# Altium PCB mdap.PcbDoc (part 2 of 2)
Units mil, origin at the board's own origin, x right, y up, seen from the top; angles counter-clockwise.
Board outline 1970 x 1970 mil, 4 copper layers (Top Layer, Internal Plane 1, Signal Layer 1, Bottom Layer), stack 45.004 mil thick; 153 components, 124 nets, 474 pads, 214 vias.
Unrouted connection lines stored in the file: 3.
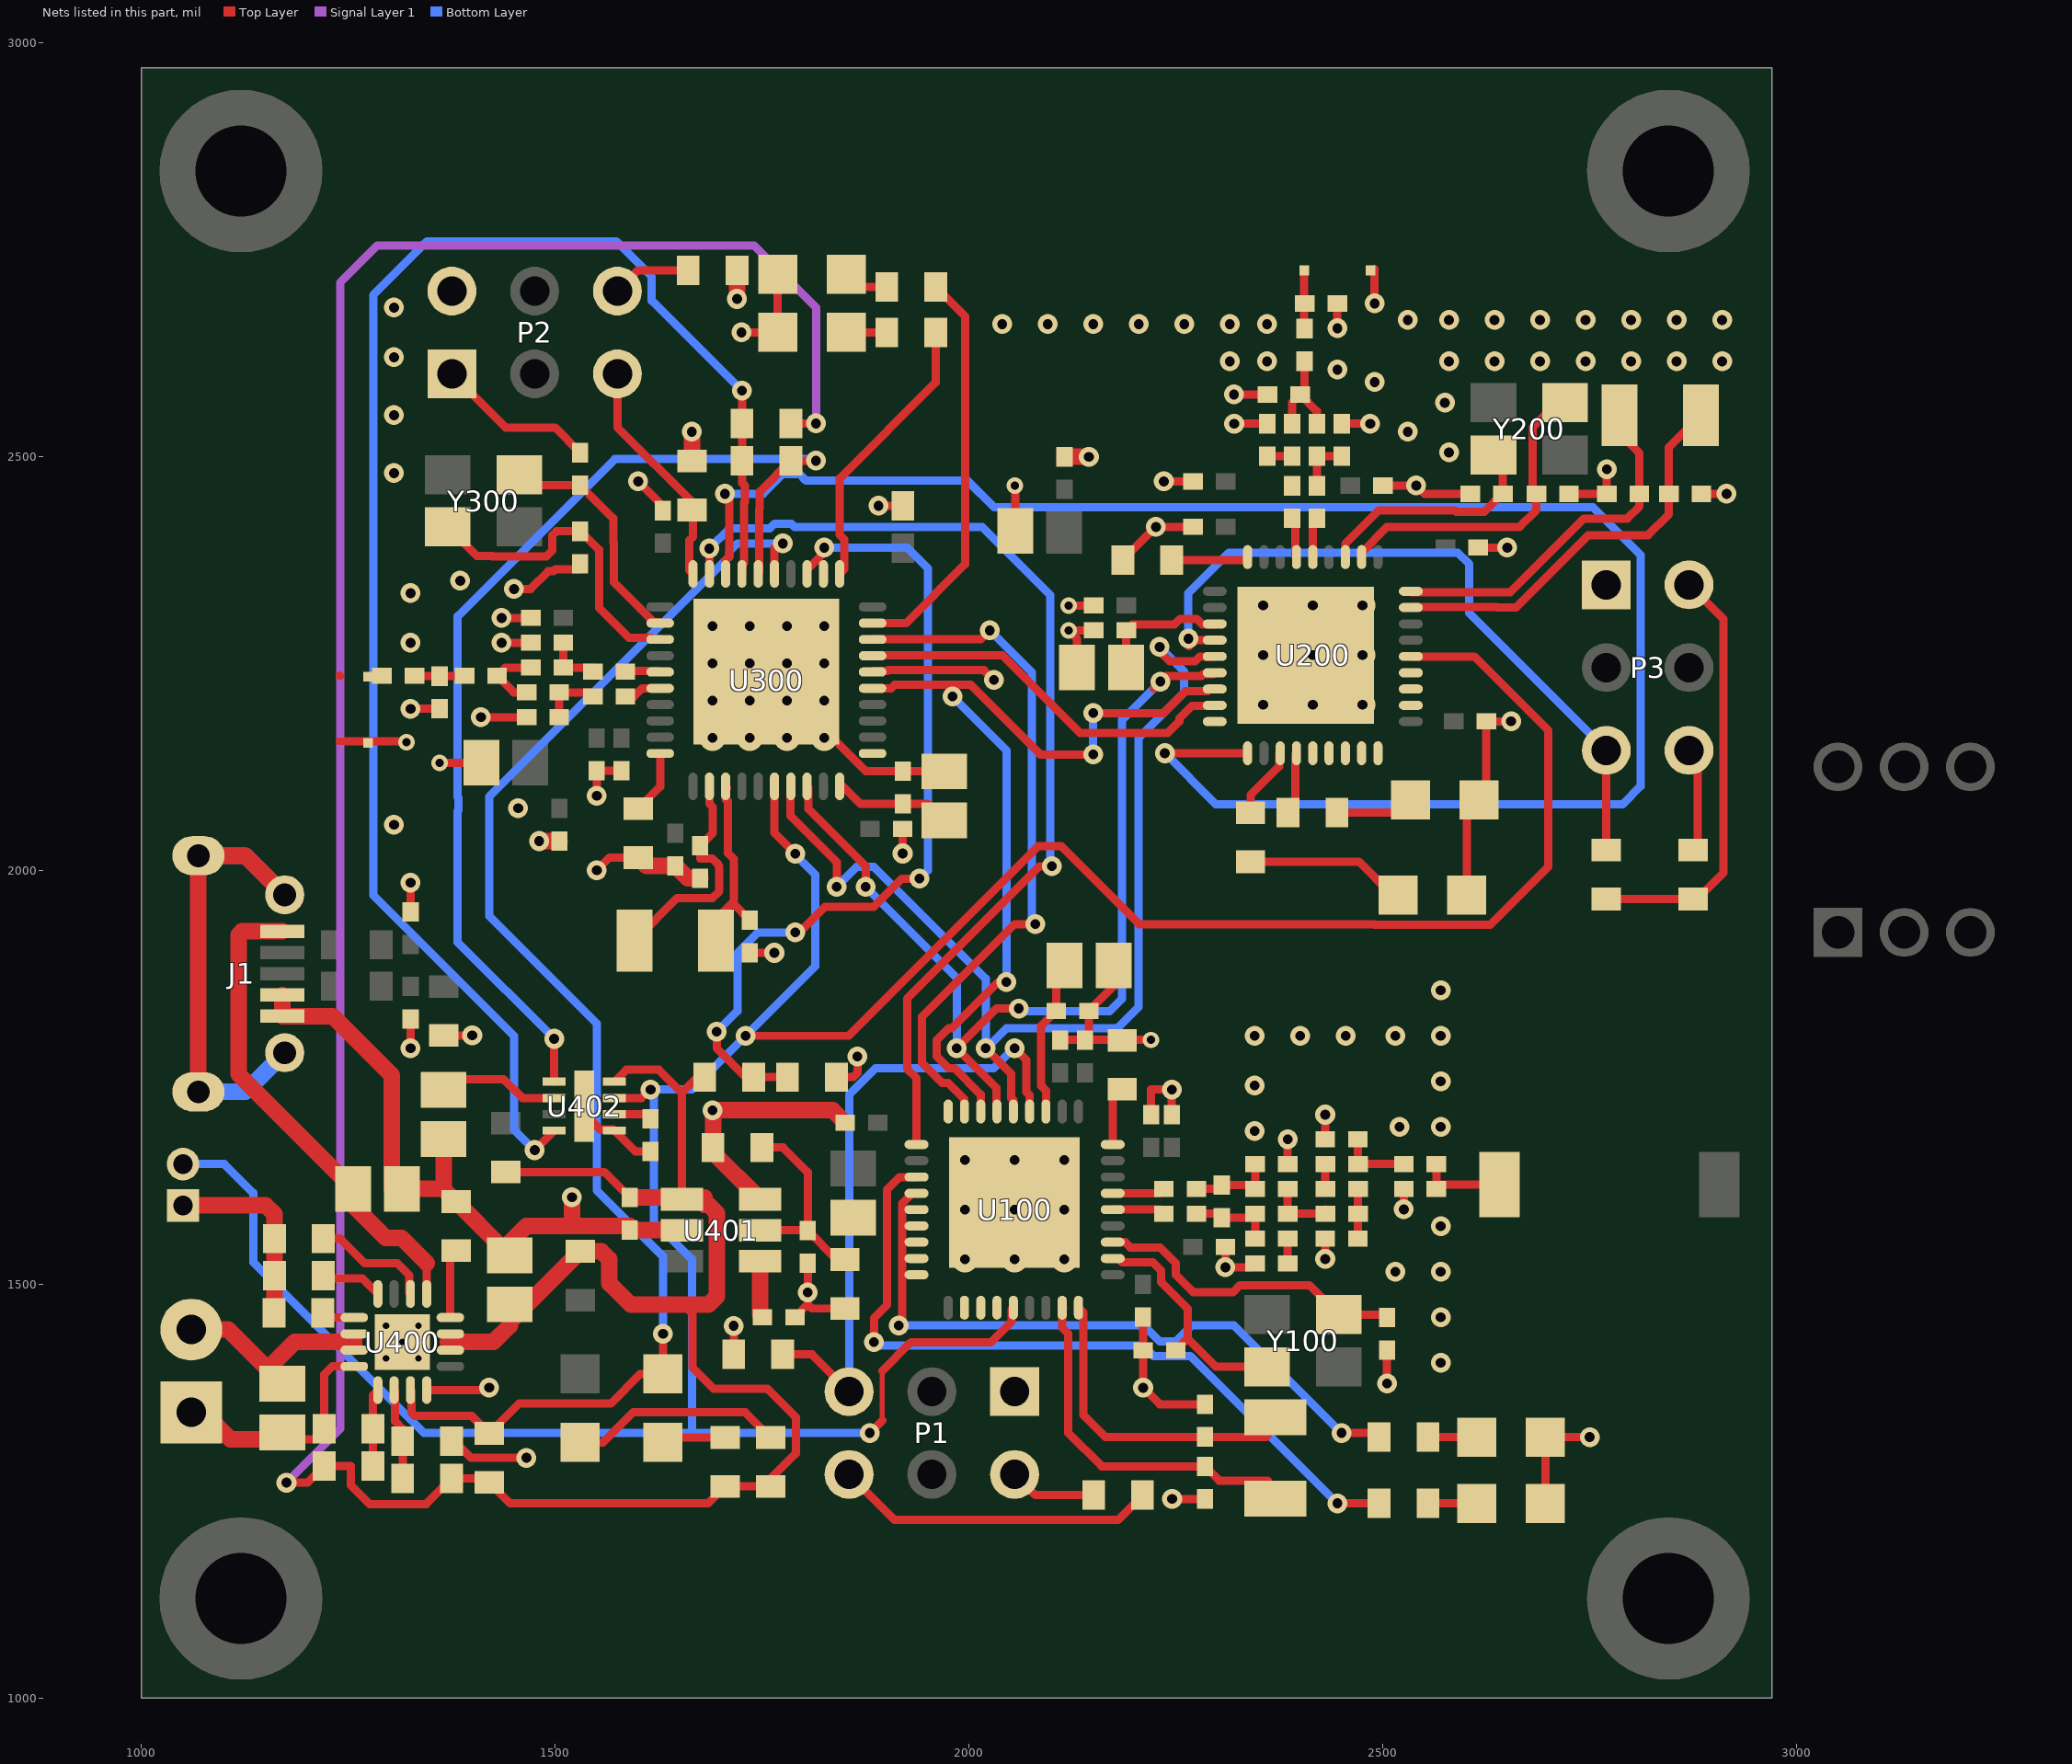
[diagram p4: the nets of this part, all layers, seen from the top]

## Via types
v1: diameter 24, hole 12, Top Layer to Bottom Layer, 169 vias
v2: diameter 31.5, hole 11.81, Top Layer to Bottom Layer, 34 vias
v3: diameter 20, hole 10, Top Layer to Bottom Layer, 6 vias
v4: diameter 19.68, hole 7.87, Top Layer to Bottom Layer, tented top, 5 vias

## Nets (pads, with @x,y where several pads share a name; then routed paths per layer and width w, separated by ;. In a path a pad name is that pad's centre, name@x,y a point inside that pad or via, vN(x,y) a via of type N, cw(c..) or ccw(c..) an arc to the next point about the centre after c; other vN are vias at no path point) (continued)
GND: A200.2 A300.2 C100.1 C101.1 C102.1 C103.1 C104.1 C105.1 C106.1 C107.2 C108.2 C109.1 C113.1 C114.2 C115.1 C116.1 C117.1 C118.1 C119.1 C200.1 C201.1 C202.1 C203.1 C204.1 C205.1 C206.1 C207.2 C208.2 C209.1 C213.1 C214.1 C215.1 C216.1 C217.1 C218.1 C300.2 C301.2 C302.1 C303.1 C304.1 C305.1 C306.1 C307.1 C308.1 C311.1 C313.1 C314.1 C315.1 C316.1 C317.1 C318.1 C319.1 C320.1 C400.1 C401.1 C402.1 C403.1 C404.1 C405.1 C406.1 C407.1 D1.2 D2.2 D3.2 D4.2 D5.2 D6.2 J1.4 J1.5 L108.2 L203.2 L301.2 P1.1 P2.1 P3.1 P400.1 R11.1 R101.1 R202.1 R305.1 R407.1 R408.1 R409.1 R410.1 R411.1 R412.1 R413.1 S1.1 U100.37 U200.37 U300.1 U300.41 U400.4 U400.8 U400.17 U401.2 U402.1 U402.9 | length 4986.9
  Top Layer w10: C404.1@1160,1312.6 1208.07,1312.6 R413.1@1220.47,1325 1220.47,1390.47 1230.47,1400.47 U400.4@1256.93,1400.47 ; 1239.65,2155.75 v3@1319.25,2155.75 ; v1(1325,1785) C301.2@1325,1820.31 ; C300.2@1325,1949.69 v1(1325,1985) ; v1(1325,2195) 1325.32,2195.32 C311.1@1360,2195.32 ; U400.8@1344.53,1371.93 1416.93,1371.93 v1(1420,1375) ; v3(1360,2130) C308.1@1410.47,2130 ; R412.1@1374.53,1310 1377.99,1310 1397.99,1290 v1(1465,1290) ; P2.1@1375,2600 1440,2535 1499.69,2535 C315.1@1530,2504.68 ; v1(1410,2185) C313.1@1465.32,2185 ; v1(1435,2275) L301.2@1470.31,2275 ; v1(1435,2305) C302.1@1470.32,2305 ; v1(1450,2340) 1470,2340 1491.38,2361.38 1497.44,2361.38 1500.06,2364 1530,2364 C314.1@1530,2370.32 ; U402.9@1535,1715 1535,1705.9 1553.75,1687.16 1569.73,1687.16 U402.1@1571.42,1685.47 1596.57,1660.32 C406.1@1615,1660.32 ; v1(1550,2090) C304.1@1550,2120.32 C303.1@1580,2120.32 ; v1@1555,1995 v1(1550,2000) 1565.47,2015.47 R305.1@1600,2015.47 ; v1(1600,2470) 1630,2440 C305.1@1630,2434.68 ; v1@1720,2645 v1(1725,2650) D4.2@1768.66,2650 D3.2@1768.66,2720 ; C316.1@1735,1900.32 v1(1764.68,1900.32) v1@1765,1900 ; U300.41@1755,2240 1875.32,2119.68 C318.1@1920,2119.68 ; C401.1@1789.68,1460 1805,1475.31 ; C402.1@1805,1525.32 v1(1805,1490) 1805,1475.31 ; R11.1@1839.53,1750 1860,1750 1865,1755 v1(1865,1775) ; R408.1@1850,1470.47 1809.84,1470.47 1805,1475.31 ; v1@1890,2440 v1(1890.59,2440.59) C320.1@1920,2440.59 ; v1(1919.68,2020.32) C307.1@1919.68,2050 ; C318.1@1920.16,2119.53 C319.1@1970,2119.53 ; v3(2055.32,2465) 2055.79,2464.53 C206.1@2055.79,2410 ; C105.1@2105,1794.68 2105.31,1795 v3(2220,1795) ; v3(2120.32,2320) C203.1@2150.63,2320 ; C208.2@2130.47,2245 2130.47,2279.84 v3(2120.32,2290) C207.2@2150.63,2290 ; C102.1@2144.69,1794.84 C107.2@2144.69,1830 2174.53,1859.84 C108.2@2174.53,1885 ; R202.1@2185.79,2375 v1(2225.79,2415) C202.1@2270.63,2415 ; C100.1@2210.32,1460 C116.1@2210.32,1420 v1(2210.32,1374.68) 2230.32,1354.68 C118.1@2285,1354.68 ; C101.1@2220,1704.68 2220,1735 v1(2245,1735) C104.1@2245,1704.68 ; v1(2235.32,2470) C201.1@2270.63,2470 ; v1(2245.32,1240.32) C119.1@2285,1240.32 ; C103.1@2309.68,1545 v1(2309.68,1520.32) C109.1@2340.94,1520.32 ; v1(2320,2575) C213.1@2360.63,2575 ; v1(2320.31,2539.69) L203.2@2360.31,2539.69 ; C115.1@2385,1645 v1(2385,1675) ; v1(2430.32,1530.32) C113.1@2430.32,1555 ; L108.2@2430.31,1675 v1(2430.31,1704.69) ; v1(2445,2655) C214.1@2445,2685 ; C209.1@2450.32,2539.69 v1(2484.69,2539.69) ; A200.2@2489.6,2726.59 2489.6,2685.4 v1(2490,2685) ; C200.1@2500,2465 v1(2540.31,2465) 2550.31,2455 C216.1@2605.63,2455 ; v1(2505,1380) C117.1@2505,1420.32 ; v1(2525.31,1590.31) C114.2@2525.31,1615 ; D6.2@2601.34,1970 2601.34,2070 D5.2@2616.34,2085 2625,2093.66 C205.1@2625,2180 v1(2655,2180) ; C204.1@2615,2390 v1(2650.31,2390) ; D2.2@2696.34,1235 D1.2@2696.34,1315 v1(2750,1315) ; C215.1@2725,2455 C217.1@2770.63,2455 v1(2770.63,2484.69) ; C218.1@2885,2455 v1(2915.31,2455)
  Top Layer w20: S1.1@1050,1595 1150,1595 1160.47,1584.53 R407.1@1160.47,1555 R411.1@1160.47,1510 R409.1@1160.47,1465.47 ; P400.1@1075,1345 1107.4,1312.6 C404.1@1160,1312.6 ; J1.4@1170,1849.41 J1.5@1170,1823.82 1231.18,1823.82 1302.4,1752.6 1302.4,1615 1364.53,1615 R410.1@1380,1599.53 1437.13,1542.4 1465.03,1570.31 1520,1570.31 ; 1365,1615.47 C407.1@1365,1667.6 ; v1(1520,1605) 1520,1570.31 ; R305.1@1600,2015.47 1610.16,2005.32 C306.1@1645,2005.32 1660,1990.32 C317.1@1675,1990.32 ; U401.2@1652.76,1565 1590.31,1565 C400.1@1590,1565.32 1590,1570.31 1520,1570.31
  other v1: 2570,1405 2570,1460 2515,1515 2570,1515 2570,1570 2345,1685 2520,1690 2570,1690 2345,1740 2570,1745 2345,1800 2400,1800 2455,1800 2515,1800 2570,1800 2570,1855 1305,2055 1325,2275 1325,2335 1385,2350 1305,2480 2580,2505 2530,2530 1305,2550 2575,2565 2445,2605 2315,2615 2360,2615 2580,2615 2635,2615 2690,2615 2745,2615 2800,2615 2855,2615 2910,2615 1305,2620 2040,2660 2095,2660 2150,2660 2205,2660 2260,2660 2315,2660 2360,2660 2530,2665 2580,2665 2635,2665 2690,2665 2745,2665 2800,2665 2855,2665 2910,2665 1305,2680
  other v2: 1995,1530 2055,1530 2115,1530 1995,1590 2055,1590 2115,1590 1995,1650 2055,1650 2115,1650 1690,2160 1735,2160 1780,2160 1825,2160 2355.32,2200 2415.32,2200 2475.32,2200 1690,2205 1735,2205 1780,2205 1825,2205 1690,2250 1735,2250 1780,2250 1825,2250 2355.32,2260 2415.32,2260 2475.32,2260 1690,2295 1735,2295 1780,2295 1825,2295 2355.32,2320 2415.32,2320 2475.32,2320
  other v3: 1320,2155
  other v4: 1295.32,1410.31 1334.69,1410.32 1315,1430 1295.32,1449.68 1334.69,1449.69
IRQ_C1110: U100.1 U300.19 | length 1248.8
  Top Layer w10: U300.19@1686.1,2358.15 v1(1686.1,2388.9) ; U100.1@1936.5,1668.74 1936.5,1748.65 1925,1760.15 1925,1845 2085,2005 v1(2100,2005) v1@2105,2010
  Bottom Layer w10: v1(1686.1,2388.9) 1710.2,2413 1759.06,2413 1765.06,2419 1784.94,2419 1788.94,2415 2015.8,2415 2098.32,2332.48 2098.32,2006.68 v1(2100,2005)
IRQ_C2510: U200.1 U300.18 | length 2247.5
  Top Layer w10: v1(1705,2455) 1710.1,2449.9 1710.1,2378.96 1705,2373.85 1705,2358.94 U300.18@1705.79,2358.15 ; v1(2236.5,2141.5) U200.1@2336.57,2141.5
  Bottom Layer w10: v1(1705,2455) 1751.06,2455 1775.06,2479 1794.94,2479 1802.94,2471 1998,2471 2030,2439 2753.55,2439 2811.53,2381.03 2811.53,2101.53 2790,2080 2297.99,2080 v1(2236.5,2141.5)
KILL_N: R12.1 U300.16 U402.5 | length 1307.8
  Top Layer w10: U402.5@1498.58,1744.53 v1(1498.58,1796.42) ; U300.16@1745.16,2358.15 1746.1,2359.09 1746.1,2436.71 1747,2437.6 1747,2457.47 R12.1@1784.53,2495 v1(1815,2495)
  Bottom Layer w10: v1(1498.58,1796.42) 1382,1913 1382,2071.54 1383,2072.54 1383,2087.46 1382,2088.46 1382,2307 1572,2497 1813,2497 v1(1815,2495)
NetA200_1: A200.1 C214.2 L202.2 | length 70.4
  Top Layer w10: A200.1@2405,2725 2405,2655 L202.2@2405.31,2654.69
NetA300_1: A300.1 L303.2 | length 0.4
  Top Layer w10: 1239.65,2235.28 1239.92,2235
NetC107_1: C107.1 C108.1 U100.30 | length 190.3
  Top Layer w10: 2087,1739.69 2087,1812.16 2105.32,1830.47 2105.32,1874.84 C108.1@2115.47,1885 ; 2088.16,1739.69 2088.16,1738.53 2093.11,1733.58 U100.30@2093.11,1708.5
NetC109_2: C109.2 L101.2 | length 30
  Top Layer w10: C109.2@2385,1525 L101.2@2385,1555
NetC110_1: C110.1 L103.1 L107.2 | length 80.8
  Top Layer w10: L107.2@2385,1615 C110.1@2385,1585 L103.1@2430.63,1585 L103.1@2430.63,1590.16
NetC110_2: C110.2 C111.2 L101.1 L102.2 | length 104.8
  Top Layer w10: L102.2@2274.68,1585 2300.63,1585 C111.2@2305.32,1580.31 2340.94,1580.31 C110.2@2345.63,1585 L101.1@2345.63,1555
NetC111_1: C111.1 C115.2 L106.2 L107.1 | length 104.8
  Top Layer w10: L106.2@2274.68,1615 2300.63,1615 C111.1@2305.32,1619.68 2340.95,1619.68 L107.1@2345.63,1615 C115.2@2345.63,1645
NetC112_1: C112.1 L105.1 L108.1 | length 85
  Top Layer w10: C112.1@2469.68,1645.31 L108.1@2469.68,1675 ; C112.1@2470,1645 L105.1@2525.32,1645
NetC112_2: C112.2 L104.2 | length 30
  Top Layer w10: L104.2@2430.63,1615 C112.2@2430.63,1645
NetC113_2: C113.2 L103.2 L104.1 | length 59.7
  Top Layer w10: C113.2@2470,1555.32 L103.2@2470,1585 L104.1@2470,1615
NetC114_1: C114.1 E100.1 L105.2 | length 101.3
  Top Layer w10: C114.1@2564.68,1615 L105.2@2564.69,1645 L105.2@2565,1645.31 ; C114.1@2570,1620.31 E100.1@2640.87,1620.31
NetC116_2: C116.2 U100.20 Y100.1 | length 290
  Top Layer w10: U100.20@2173.82,1530.94 2180.3,1530.94 2185.08,1526.16 2222.15,1526.16 2231.84,1516.47 2231.84,1502.55 2264,1470.39 2264,1434.32 ; C116.2@2249.69,1420 2264,1434.32 ; Y100.1@2360,1400 2298.32,1400 2264,1434.32
NetC117_2: C117.2 U100.21 Y100.3 | length 384.2
  Top Layer w10: U100.21@2173.82,1550.63 2188.53,1550.63 2195,1544.16 2230.84,1544.16 2249.84,1525.16 2249.84,1511.22 2271.06,1490 2318.86,1490 2327.47,1498.61 2410.99,1498.61 Y100.3@2446.61,1462.99 2501.69,1462.99 C117.2@2505,1459.69
NetC118_2: C118.2 U100.18 Y101.1 | length 366.9
  Top Layer w10: U100.18@2132.48,1471.5 2138,1465.98 2138,1342 2164.69,1315.31 C118.2@2285,1315.31 2358.86,1315.31 Y101.1@2361.1,1317.56
NetC119_2: C119.2 U100.17 Y101.2 | length 420.6
  Top Layer w10: U100.17@2112.48,1471.5 2112.48,1447.52 2120,1440 2120,1320 2160.31,1279.69 C119.2@2285,1279.69 2302.24,1262.44 Y101.2@2361.1,1262.44 ; U100.17@2112.8,1471.5 U100.17@2113.53,1470.76
NetC207_1: C207.1 C208.1 U200.30 | length 160.6
  Top Layer w10: C208.1@2189.53,2245 C207.1@2189.53,2289.53 ; C207.1@2190,2290 2197.16,2297.16 2248.22,2297.16 2255.06,2304 2274.94,2304 2281.78,2297.16 2296.81,2297.16 U200.30@2296.81,2297.8
NetC209_2: C209.2 C210.1 L201.1 | length 65.6
  Top Layer w10: C210.1@2420.32,2464.69 L201.1@2420.31,2500.32 C209.2@2450.32,2500.32
NetC210_2: C210.2 U200.23 | length 48.9
  Top Layer w10: U200.23@2415.32,2378.5 2415.32,2420.31 C210.2@2420.32,2425.32
NetC211_1: C211.1 C212.2 L203.1 | length 30
  Top Layer w10: L203.1@2360.31,2500.32 C212.2@2390.32,2500.32
NetC211_2: C211.2 U200.24 | length 47.3
  Top Layer w10: C211.2@2390.32,2425.32 2394.44,2421.19 U200.24@2394.44,2379.69
NetC212_1: C212.1 C213.2 L201.2 L202.1 | length 125.6
  Top Layer w10: C212.1@2390.32,2539.69 2390.32,2565.32 C213.2@2400,2575 ; L202.1@2405.31,2615.32 2405.31,2580.32 C213.2@2400,2575 ; L201.2@2420.31,2539.69 2420.31,2554.69 C213.2@2400,2575
NetC215_2: C215.2 U200.20 Y200.1 | length 392.1
  Top Layer w10: U200.20@2474.37,2378.5 2474.37,2384.27 2505.1,2415 2665.32,2415 2685.63,2435.32 C215.2@2685.63,2455 2680.76,2459.87 2680.76,2535.44 2710.32,2565 Y200.1@2720.32,2565
NetC216_2: C216.2 U200.21 Y200.3 | length 285.4
  Top Layer w10: U200.21@2455.32,2379.13 U200.21@2454.69,2378.5 2454.69,2394.37 2495.32,2435 2587.01,2435 2588.85,2433.16 2622.41,2433.16 2644.25,2455 C216.2@2645,2455 2645,2490.71 Y200.3@2633.7,2502.01
NetC217_2: C217.2 U200.18 Y201.1 | length 408.2
  Top Layer w10: U200.18@2533.82,2337.17 2534.98,2336 2653.84,2336 2742.84,2425 2795.32,2425 2810,2439.69 C217.2@2810,2455 2810,2503.86 Y201.1@2792.76,2521.1
NetC218_2: C218.2 U200.17 Y201.2 | length 494.8
  Top Layer w10: U200.17@2533.82,2317.48 2534.34,2318 2636.85,2318 2637.37,2317.48 2660.78,2317.48 2748.3,2405 2820.32,2405 2845.63,2430.32 C218.2@2845.63,2455 2845.63,2511.1 Y201.2@2884.53,2550
NetC309_1: C309.1 C310.2 L301.1 | length 65.6
  Top Layer w10: L301.1@1509.68,2275 C310.2@1509.69,2245 C309.1@1545.32,2245
NetC309_2: C309.2 U300.25 | length 46.6
  Top Layer w10: C309.2@1584.69,2245 1584.69,2240.82 1625.48,2240.82 U300.25@1626.65,2239.65
NetC310_1: C310.1 L302.1 L304.2 | length 88.7
  Top Layer w10: L304.2@1465.31,2215 1449.68,2215 L302.1@1429.68,2235 1439.69,2245 C310.1@1470.32,2245
NetC311_2: C311.2 L302.2 L303.1 | length 60.6
  Top Layer w10: L303.1@1329.68,2235 L302.2@1390.31,2235
NetC312_1: C312.1 C313.2 L304.1 | length 70.6
  Top Layer w10: C313.2@1504.69,2185 L304.1@1504.68,2215 C312.1@1545.31,2215
NetC312_2: C312.2 U300.26 | length 46.1
  Top Layer w10: C312.2@1584.69,2210 1595.08,2210 1605.04,2219.96 U300.26@1626.65,2219.96
NetC314_2: C314.2 U300.23 Y300.1 | length 391.1
  Top Layer w10: Y300.1@1370,2415 1405,2380 1423.46,2380 1424.08,2379.38 1489.14,2379.38 1496.17,2386.41 1496.17,2404.58 1501.28,2409.69 C314.2@1530,2409.69 1530.67,2409.69 1552.84,2387.51 1552.84,2317.16 1589,2281 1616.16,2281 1616.16,2279.02 U300.23@1626.65,2279.02
NetC315_2: C315.2 U300.22 Y300.3 | length 282.5
  Top Layer w10: Y300.3@1458.9,2467.56 1461.14,2465.31 C315.2@1530,2465.31 1570,2425.32 1570,2396.65 1570.84,2395.81 1570.84,2348.02 1618.99,2299.87 1625.48,2299.87 U300.22@1626.65,2298.7
NetC316_2: C316.2 U300.33 Y301.1 | length 232.9
  Top Layer w10: Y301.1@1694.21,1915 1694.21,1940.9 1714,1960.69 1716,1958.69 ; U300.33@1707.42,2099.83 U300.33@1705.79,2101.46 1705.79,2086.13 1708.42,2083.5 1708.42,2020.98 1716,2013.39 1716,1958.69 ; C316.2@1735,1939.69 1716,1958.69
NetC317_2: C317.2 U300.32 Y301.2 | length 278.7
  Top Layer w10: Y301.2@1595.79,1915 1647.29,1966.5 1689.81,1966.5 1698,1974.69 1698,2004.88 ; U300.32@1686.1,2101.46 1686.1,2080.36 1690.42,2076.04 1690.42,2045.1 C317.2@1675,2029.69 1675,2014.13 1689.81,2014.13 1696.84,2007.1 1696.84,2006.03 1697,2005.88
NetC318_2: C318.2 C319.2 U300.40 | length 143.4
  Top Layer w10: U300.40@1843.58,2101.46 1847.48,2101.46 1868.63,2080.31 C318.2@1920,2080.31 1950.16,2080.31 C319.2@1970,2060.47
NetC401_2: C401.2 U401.4 | length 68.9
  Top Layer w20: U401.4@1747.24,1527.6 1747.24,1463.07 C401.2@1750.31,1460
NetC402_2: C402.2 R406.1 R408.2 U401.5 | length 255.7
  Top Layer w10: U401.5@1747.24,1565 1804.68,1565 C402.2@1805,1564.69 ; R406.1@1749.53,1665 1775,1665 1805,1635 C402.2@1805,1564.69 ; R408.2@1850,1529.53 1840.16,1529.53 C402.2@1805,1564.69
NetC404_2: C404.2 P400.2 U400.2 U400.3 | length 264.1
  Top Layer w10: C404.2@1152.2,1397.32 1160,1405.12
  Top Layer w20: P400.2@1060,1445 1104.53,1445 1152.2,1397.32 C404.2@1170,1379.53 ; 1160,1405.12 1184.88,1430 1255,1430 1256.93,1431.93 U400.3@1256.93,1423.98
NetC406_2: C406.2 U402.2 | length 45.8
  Top Layer w10: U402.2@1571.42,1705.16 1609.53,1705.16 C406.2@1615,1699.69
NetC407_2: C407.2 U402.6 | length 127.9
  Top Layer w10: C407.2@1380,1747.4 1437.6,1747.4 1460.16,1724.84 U402.6@1498.58,1724.84
NetD1_1: D1.1 R2.2 | length 59.1
  Top Layer w10: R2.2@2554.53,1315 D1.1@2613.66,1315
NetD2_1: D2.1 R3.2 | length 59.1
  Top Layer w10: R3.2@2554.53,1235 D2.1@2613.66,1235
NetD3_1: D3.1 R4.2 | length 34.1
  Top Layer w10: D3.1@1866.34,2705 R4.2@1900.47,2705
NetD4_1: D4.1 R5.2 | length 49.1
  Top Layer w10: D4.1@1851.34,2650 R5.2@1900.47,2650
NetD5_1: D5.1 R8.2 | length 66.6
  Top Layer w10: R8.2@2444.84,2070 D5.1@2511.42,2070
NetD6_1: D6.1 R9.2 | length 187.9
  Top Layer w10: R9.2@2340.32,2010.47 2470.95,2010.47 D6.1@2511.42,1970
NetD400_1: D400.1 R400.1 | length 257.7
  Top Layer w10: D400.1@1530,1308.66 1557.56,1308.66 1593.9,1345 1729.53,1345 R400.1@1760,1314.53
NetD401_1: D401.1 R402.1 | length 96.9
  Top Layer w10: D401.1@1616.22,1294.88 1635.87,1314.53 R402.1@1705,1314.53
NetJ1_6: J1.6 J1.7 J1.8 J1.9 | length 657.1
  Top Layer w20: J1.7@1068.62,1732.28 J1.9@1068.62,2017.72 1125.71,2017.72 J1.8@1172.95,1970.47
  Bottom Layer w20: J1.7@1068.62,1732.28 1125.71,1732.28 J1.6@1172.95,1779.53 ; J1.9@1068.62,2017.72 1125.71,2017.72 J1.8@1172.95,1970.47
NetL102_1: L102.1 U100.23 | length 63.6
  Top Layer w10: U100.23@2173.82,1590 2230.31,1590 L102.1@2235.31,1585
NetL106_1: L106.1 U100.24 | length 63.7
  Top Layer w10: U100.24@2173.82,1609.68 2230,1609.68 L106.1@2235.31,1615
NetP1_6: P1.6 R1.2 | length 390.2
  Top Layer w10: P1.6@1855,1270 1910,1215 2180,1215 R1.2@2210,1245
NetP2_6: P2.6 R6.2 | length 95.8
  Top Layer w10: P2.6@1575,2700 1600,2725 R6.2@1660.47,2725
NetP3_6: P3.6 R7.2 | length 124.6
  Top Layer w10: P3.6@2870.32,2145 2880.31,2135 R7.2@2880.31,2024.53
NetR2_1: R2.1 U100.4 | length 828.1
  Top Layer w10: v1@1919,1451 1917.99,1450 v1(1915,1450) 1919,1454 1919,1597.25 1931.43,1609.68 U100.4@1936.5,1609.68 ; v1(2450,1320) 2490.47,1320 R2.1@2495.47,1315
  Bottom Layer w10: v1(1915,1450) 2211.06,1450 2230.06,1431 2249.94,1431 2268.94,1450 2320,1450 v1(2450,1320)
NetR3_1: R3.1 U100.3 | length 923.9
  Top Layer w10: v1(1885,1430) 1885,1458.94 1901,1474.94 1901,1614.34 1916.03,1629.37 U100.3@1936.5,1629.37 ; v1(2445,1235) R3.1@2495.47,1235
  Signal Layer 1 w10: v1(1885,1430) v1@1889,1426
  Bottom Layer w10: v1@1889,1426 2209.6,1426 2222.6,1413 2267,1413 v1(2445,1235)
NetR4_1: R4.1 U300.9 | length 490.9
  Top Layer w10: U300.9@1883.35,2298.7 1923.7,2298.7 1995,2370 1995,2669.53 R4.1@1959.53,2705
NetR5_1: R5.1 U300.11 | length 344.4
  Top Layer w10: U300.11@1843.58,2358.15 1849,2363.57 1849,2399.94 1843.58,2405.36 1843.58,2473.58 1959.53,2589.53 R5.1@1959.53,2650
NetR8_1: R8.1 U200.4 | length 75.6
  Top Layer w10: R8.1@2385.79,2070 2394.44,2078.66 2394.44,2140.31 U200.4@2395.63,2141.5
NetR9_1: R9.1 U200.3 | length 86.7
  Top Layer w10: R9.1@2340.32,2069.53 2340.32,2091.02 2374.76,2125.46 2374.76,2140.31 U200.3@2375.94,2141.5
NetR101_2: R101.2 U100.27 | length 62.9
  Top Layer w10: U100.27@2173.82,1668.74 R101.2@2173.82,1731.65
NetR202_2: R202.2 U200.27 | length 93.2
  Top Layer w10: R202.2@2244.84,2375 2333.07,2375 U200.27@2336.57,2378.5
NetR305_2: R305.2 U300.30 | length 77.7
  Top Layer w10: R305.2@1600,2074.53 1626.65,2101.18 U300.30@1626.65,2141.22
NetR404_1: R404.1 R412.2 U400.6 | length 111.2
  Top Layer w10: U400.6@1305.16,1371.93 1306.31,1370.78 1306.31,1334.17 1315.47,1325 R404.1@1315.47,1265
NetR405_1: R405.1 R413.2 U400.5 | length 94.4
  Top Layer w10: R405.1@1279.53,1280 R413.2@1279.53,1325 1279.53,1365.98 U400.5@1285.47,1371.93
NetR407_2: R407.2 U400.14 | length 145.4
  Top Layer w10: R407.2@1219.53,1555 1240,1555 1270,1525 1309.04,1525 1323.67,1510.37 1323.67,1489.24 U400.14@1324.84,1488.07
NetR409_2: R409.2 U400.1 | length 40.1
  Top Layer w10: R409.2@1219.06,1465 1224.53,1459.53 U400.1@1256.93,1459.53
NetR410_2: R410.2 U400.12 | length 83.8
  Top Layer w10: U400.12@1373.07,1459.53 1373.07,1533.54 R410.2@1380,1540.47
NetR411_2: R411.2 U400.16 | length 75
  Top Layer w10: R411.2@1219.53,1510 1222.53,1507 1266.54,1507 U400.16@1285.47,1488.07
NetU100_5: U100.5
NetU100_6: U100.6
NetU100_7: U100.7
NetU100_8: U100.8
NetU100_9: U100.9
NetU100_11: U100.11
NetU100_12: U100.12
NetU100_13: U100.13
NetU100_36: U100.36
NetU200_5: U200.5
NetU200_6: U200.6
NetU200_7: U200.7
NetU200_8: U200.8
NetU200_9: U200.9
NetU200_11: U200.11
NetU200_12: U200.12
NetU200_13: U200.13
NetU200_36: U200.36
NetU300_6: U300.6 | length 152.6
  Top Layer w10: U300.6@1883.35,2239.65 1884.7,2241 1901.6,2241 1902.6,2242 2018,2242 v1(2030,2230)
NetU300_12: U300.12
PB_N: S1.2 U100.14 U200.14 U300.36 U402.3 | length 3774
  Top Layer w6: 1895,1335 1895,1395
  Top Layer w10: U402.3@1571.42,1724.84 1603.88,1724.84 1614.04,1735 v1(1615,1735) ; v1(1730,1800) 1854.54,1800 2083.54,2029 2111.46,2029 2205.46,1935 2489.45,1935 2490.07,1934.38 2629.93,1934.38 2700,2004.45 2700,2168.94 2610.52,2258.43 U200.14@2533.82,2258.43 ; U300.36@1764.84,2101.46 1764.84,2045.16 v1(1790,2020) ; v1(1880,1320) 1895,1335 ; 1895,1395 1928.53,1428.53 1929.34,1428.53 1930.34,1429.53 2026.31,1429.53 2051.24,1454.46 2051.24,1469.31 U100.14@2053.43,1471.5
  Bottom Layer w10: S1.2@1050,1645 1100,1645 1135,1610 1135,1526.34 1341.34,1320 1665,1320 ; 1619,1570 1619,1731 v1(1615,1735) 1665,1735 v1(1730,1800) 1814,1884 1814,1994.94 1790,2018.94 v1(1790,2020) ; 1625,1570 1665,1530 1665,1320 ; v1(1880,1320) 1665,1320
REQ_KILL: R12.2 R415.1 U300.17 U402.8 | length 1942.4
  Top Layer w10: v1@1475,1655 v1(1475,1661.89) U402.8@1498.58,1685.47 ; U300.17@1725.47,2358.15 1725.47,2368.87 1728.1,2371.5 1728.1,2444.16 1729,2445.06 1729,2464.94 1725.47,2468.47 R12.2@1725.47,2495 R415.1@1725.47,2540 v1(1725.47,2579.53)
  Bottom Layer w10: v1(1475,1661.89) 1450,1686.89 1450,1800 1280,1970 1280,2695 1345,2760 1573.73,2760 1616.53,2717.2 1616.53,2688.47 v1(1725.47,2579.53)
RST_1110: P1.5 R100.1 U100.31 | length 765.3
  Top Layer w10: R100.1@1774.53,1415 1810,1415 P1.5@1855,1370 ; v1(2055,1785) 2069,1771 2069,1732.24 2073.11,1728.12 U100.31@2073.11,1708.5
  Bottom Layer w10: P1.5@1855,1370 1855,1728.94 1887.06,1761 2029.94,1761 2053.94,1785 v1(2055,1785)
RST_2510: P3.5 R200.1 U200.31 | length 878.3
  Top Layer w10: v1(2265,2280) 2265,2271.39 2265.69,2270.69 2273.11,2278.11 U200.31@2296.81,2278.11 ; R200.1@2770,2024.53 P3.5@2770,2145
  Bottom Layer w10: v1(2265,2280) 2265,2335 2314,2384 2590.26,2384 2604.32,2369.94 2604.32,2310.68 P3.5@2770,2145
RST_2540: P2.5 R300.1 U300.20 | length 283.3
  Top Layer w10: P2.5@1575,2600 1575,2535.34 1666.42,2443.92 1666.42,2403.15 1662.1,2398.84 1662.1,2362.46 U300.20@1666.42,2358.15
SENSE_VBATT: R10.1 R11.2 U300.13 | length 1037.6
  Top Layer w10: v1(1695,1805) 1695,1785 1730,1750 R10.1@1739.53,1750 R11.2@1780.47,1750 ; v1(1790,1925) 1795,1925 1826,1956 1884.94,1956 1918.94,1990 v1(1940,1990) ; U300.13@1804.21,2358.15 1804.21,2363.23 1825,2384.02 v1(1825,2390)
  Bottom Layer w10: v1(1695,1805) 1720,1830 1720,1900 1745,1925 v1(1790,1925) ; v1(1825,2390) 1925,2390 1950,2365 1950,2000 v1(1940,1990)
SPI_CK: U100.34 U200.34 U300.5 | length 1109.5
  Top Layer w10: U300.5@1883.35,2219.96 1906.02,2219.96 1910.06,2224 2002.06,2224 2086.06,2140 v1(2150,2140) ; U100.34@2014.06,1708.5 2014.06,1729.12 1982.18,1761 1975.06,1761 1961,1775.06 1961,1794.94 1975.06,1809 1979,1809 2035,1865 v1(2045,1865) ; v1(2150,2190) 2235,2190 2261.69,2216.69 2288.06,2216.69 2290.42,2219.06 U200.34@2296.81,2219.06
  Bottom Layer w10: v1(1980,2210) 2045,2145 v1(2045,1865) ; v1(2150,2140) v1(2150,2190)
SPI_MI: U100.32 U200.32 U300.37 | length 1320.1
  Top Layer w10: U300.37@1784.53,2101.46 1784,2100.93 1784,2066 1840,2010 v1(1840,1980) ; v1(2020,1785) 2051,1754 2051,1724.78 2053.43,1722.35 U100.32@2053.43,1708.5 ; v1(2230.18,2270) 2230.18,2264.82 2242.31,2252.69 2273.15,2252.69 2278.88,2258.43 U200.32@2296.81,2258.43
  Bottom Layer w10: v1(1840,1980) 1864,2004 1884.94,2004 2020,1868.94 v1(2020,1785) 2021.06,1785 2045.06,1809 2179,1809 2205,1835 2205,2160 2260,2215 2260,2240.18 v1(2230.18,2270)
SPI_MO: U100.33 U200.33 U300.38 | length 1201.9
  Top Layer w10: U300.38@1804.21,2101.46 1805.9,2099.77 1805.9,2074.1 1875,2005 v1(1875,1980) ; U100.33@2033.74,1708.5 2033,1709.24 2033,1737 v1(1985,1785) 2033,1833 v1(2060,1833) ; v1@2223.18,2220 v1(2231.18,2228) 2237.88,2234.69 2280.61,2234.69 2282.97,2237.06 2295.13,2237.06 U200.33@2296.81,2238.74
  Bottom Layer w10: v1(1875,1980) 1985,1870 v1(1985,1785) ; v1@2060,1830 v1(2060,1833) 2063,1830 2170,1830 2185,1845 2185,2181.82 v1(2231.18,2228)
SPI_SS_C1110: U100.35 U300.8 | length 847.3
  Top Layer w10: U300.8@1883.35,2279.02 2014.02,2279.02 v1(2025,2290) ; U100.35@1994.37,1708.5 1994.37,1723.35 1974.72,1743 1967.6,1743 1943,1767.6 1943,1823 2055,1935 v1(2080,1935)
  Bottom Layer w10: v1(2025,2290) 2076,2239 2076,1939 v1(2080,1935)
SPI_SS_C2510: U200.35 U300.7 | length 468.5
  Top Layer w10: U300.7@1883.35,2259.33 1884.02,2260 2040,2260 2134,2166 2239.94,2166 2254,2180.06 2254,2183.54 2269.15,2198.69 2296.14,2198.69 U200.35@2296.81,2199.37
USB_PGOOD: D401.2 R403.1 U300.15 U400.7 | length 1685.8
  Top Layer w10: U400.7@1324.84,1371.93 1326.02,1370.76 1326.02,1344.67 1329.97,1340.72 1398.81,1340.72 R403.1@1420,1319.53 1456.19,1355.72 1566.82,1355.72 1602.44,1391.34 D401.2@1630,1391.34 v1(1630,1440) ; U300.15@1764.84,2358.15 1764.84,2389.84 1770,2395 v1(1775,2395)
  Bottom Layer w10: v1(1630,1440) 1630,1533.54 1550,1613.54 1550,1815 1420,1945 1420,2088.85 1710.1,2378.96 1710.1,2385.1 1720,2395 v1(1775,2395)
VBATT: C400.2 C405.2 R10.2 R400.2 R401.2 R402.2 R403.2 R404.2 R405.2 R414.2 R415.2 U400.10 U400.11 U401.1 U402.4 | length 4327.6
  Top Layer w10: v1(1175,1260) 1200.47,1260 R405.2@1220.47,1280 1252.75,1280 1252.75,1256.9 1275.36,1234.28 1343.81,1234.28 R404.2@1374.53,1265 1415.47,1265 R403.2@1420,1260.47 1445.47,1235 1684.53,1235 R402.2@1705,1255.47 R400.2@1760,1255.47 1760,1264.65 1790.72,1295.36 1790.72,1339.28 1756.23,1373.77 1691.23,1373.77 1665.62,1399.38 1665.62,1464.38 1655,1475 ; R414.2@1435,1635.47 R414.2@1437.42,1637.89 ; R414.2@1440,1635.47 1559.21,1635.47 C400.2@1590,1604.69 ; U402.4@1571.42,1744.53 1585.89,1759 1624.94,1759 1652.76,1731.19 ; U401.1@1652.76,1602.4 1652.76,1604.69 1652.76,1731.19 ; R10.2@1680.47,1750 1671.57,1750 1652.76,1731.19 ; R415.2@1784.53,2540 v1(1815,2540)
  Top Layer w20: 1370,1430 1425.12,1430 1445,1449.88 1445,1454.53 R401.2@1530,1539.53 1555.47,1539.53 1565,1530 1565,1501.01 1591.01,1475 1655,1475 1685,1475 1695,1485 1695,1505.37 1695.35,1505.72 1695.35,1585.82 1685.39,1595.78 1680.31,1595.78 1680.31,1604.69 1652.76,1604.69 C400.2@1590,1604.69
  Signal Layer 1 w10: v1(1175,1260) 1240,1325 1240,2710 1285,2755 1740,2755 1815,2680 v1(1815,2540)
VBUS: C403.2 J1.1 U400.13 | length 594.1
  Top Layer w10: U400.13@1344.53,1488.07 1344.53,1525.47
  Top Layer w20: J1.1@1170,1926.18 1121.18,1926.18 1117.12,1922.12 1117.12,1753.35 C403.2@1255.47,1615 1255.47,1595.33 1295,1555.8 1314.2,1555.8 1344.53,1525.47
VDD: L100.2 L200.2 L300.2 P1.2 P2.2 P3.2 R1.1 R6.1 R7.1 R100.2 R200.2 R300.2 R301.2 R406.2 U401.6 | length 1114
  Top Layer w10: R301.2@1365,1800.47 v1(1399.53,1800.47) v1@1400,1800 ; v1@1715,1450 v1(1715.47,1449.53) R100.2@1715.47,1415 ; P1.2@2055,1270 2080,1245 R1.1@2150.47,1245 ; R200.2@2770,1965.47 R7.1@2875,1965.47 ; P3.2@2870.32,2345 2911.84,2303.47 2911.84,1997 R7.1@2880.31,1965.47
  Top Layer w20: v1@1480,2035 v1(1480.31,2035.31) L300.2@1505,2035.31 ; R300.2@1665,2494.53 v1(1665,2530) ; R6.1@1719.53,2725 v1(1719.53,2690.47) v1@1720,2690 ; U401.6@1747.24,1602.4 1690.47,1659.17 R406.2@1690.47,1665 1690.47,1709.53 v1(1690,1710) 1835.31,1710 L100.2@1850.31,1695 ; L200.2@2115.31,2499.69 v1(2144.69,2499.69)
  other v1: 1455,2075 2490,2590
pads on no net: Designator1.1 Designator1.2 Designator1.3 Designator1.4 Designator1.5 Designator1.6 E100.2 U400.15 Y100.2 Y100.4 Y200.2 Y200.4 Y300.2 Y300.4

## Polygon pours and split planes (outlines as drawn)
VDD on Signal Layer 1 "Signal Layer 1-No Net" (solid, remove dead copper, pour order 8): 1000,1200 2950,1200 2955,1195 2955,2775 1005,2775
AVDD_CC2510 on Signal Layer 1 "Signal Layer 1-No Net" (solid, remove dead copper, pour order 6): 2585.63,2204.69 2585.63,2459.69 2545.32,2500 2245,2500 2155,2410 2155,2100 2200,2055 2505,2055 2585,2135 2585.63,2135.63 2585.63,2204.69
AVDD_CC2540 on Signal Layer 1 "Signal Layer 1-No Net" (solid, remove dead copper, pour order 4): 1510,2130 1510,2340 1600,2430 1840,2430 1925,2345 1925,2140 1850,2065 1575,2065 1510,2130
AVDD_CC1110 on Signal Layer 1 "Signal Layer 1-No Net" (solid, remove dead copper, pour order 2): 1900,1450 1900,1735 1925,1760 2270,1760 2295,1735 2295,1450
GND on Top Layer "Signal Layer 1-No Net" (solid, remove dead copper, pour order 6): 1000,1200 2595,1200 2595,1900 2600,1905 2955,1905 2955,2685 1890,2685 1795,2780 1275,2780 1275,2050 1255,2030 1000,2030
GND on Bottom Layer "Signal Layer 1-No Net" (solid, remove dead copper, pour order 6): 995,1200 2590,1200 2590,1900 2595,1905 2950,1905 2950,2685 1885,2685 1790,2780 1270,2780 1270,2050 1250,2030 995,2030
GND on Internal Plane 1 (split plane): 2949.9,1020.1 1020.1,1020.1 1020.1,2949.9 2949.9,2949.9

## Silkscreen, mask and mechanical layers (free items; w line width, h text height)
Mechanical 1:
  circle w10: c1120,1120 r120
  circle w10: c1120,2850 r120
  circle w10: c2845,2845 r120
  circle w10: c2845,1120 r120
  lines w10: 1000,1200 2965,1200 ; 1000,2775 2965,2775 ; 1000,1000 1000,2965 2965,2965 2965,1000 1000,1000

## Text inside footprints (layer, text, board x,y; h text height)
P1: Top Overlay "6" at 1880,1205 h50 r180; Top Overlay "5" at 1875,1450 h50 r180; Top Overlay "2" at 2155,1290 h50 r180; Top Overlay "1" at 2135,1390 h50 r180
P2: Top Overlay "6" at 1635,2680 h50; Top Overlay "5" at 1635,2580 h50; Top Overlay "2" at 1275,2680 h50; Top Overlay "1" at 1295,2580 h50
P3: Top Overlay "6" at 2850,2085 h50 r270; Top Overlay "5" at 2750,2085 h50 r270; Top Overlay "2" at 2850,2445 h50 r270; Top Overlay "1" at 2750,2425 h50 r270